# Altium PCB FallDetection.PcbDoc (part 1 of 2)
Units mil, origin at the board's own origin, x right, y up, seen from the top; angles counter-clockwise.
Board outline 2362.2 x 2362.2 mil, 2 copper layers (Top Layer, Bottom Layer); 60 components, 54 nets, 304 pads, 59 vias.
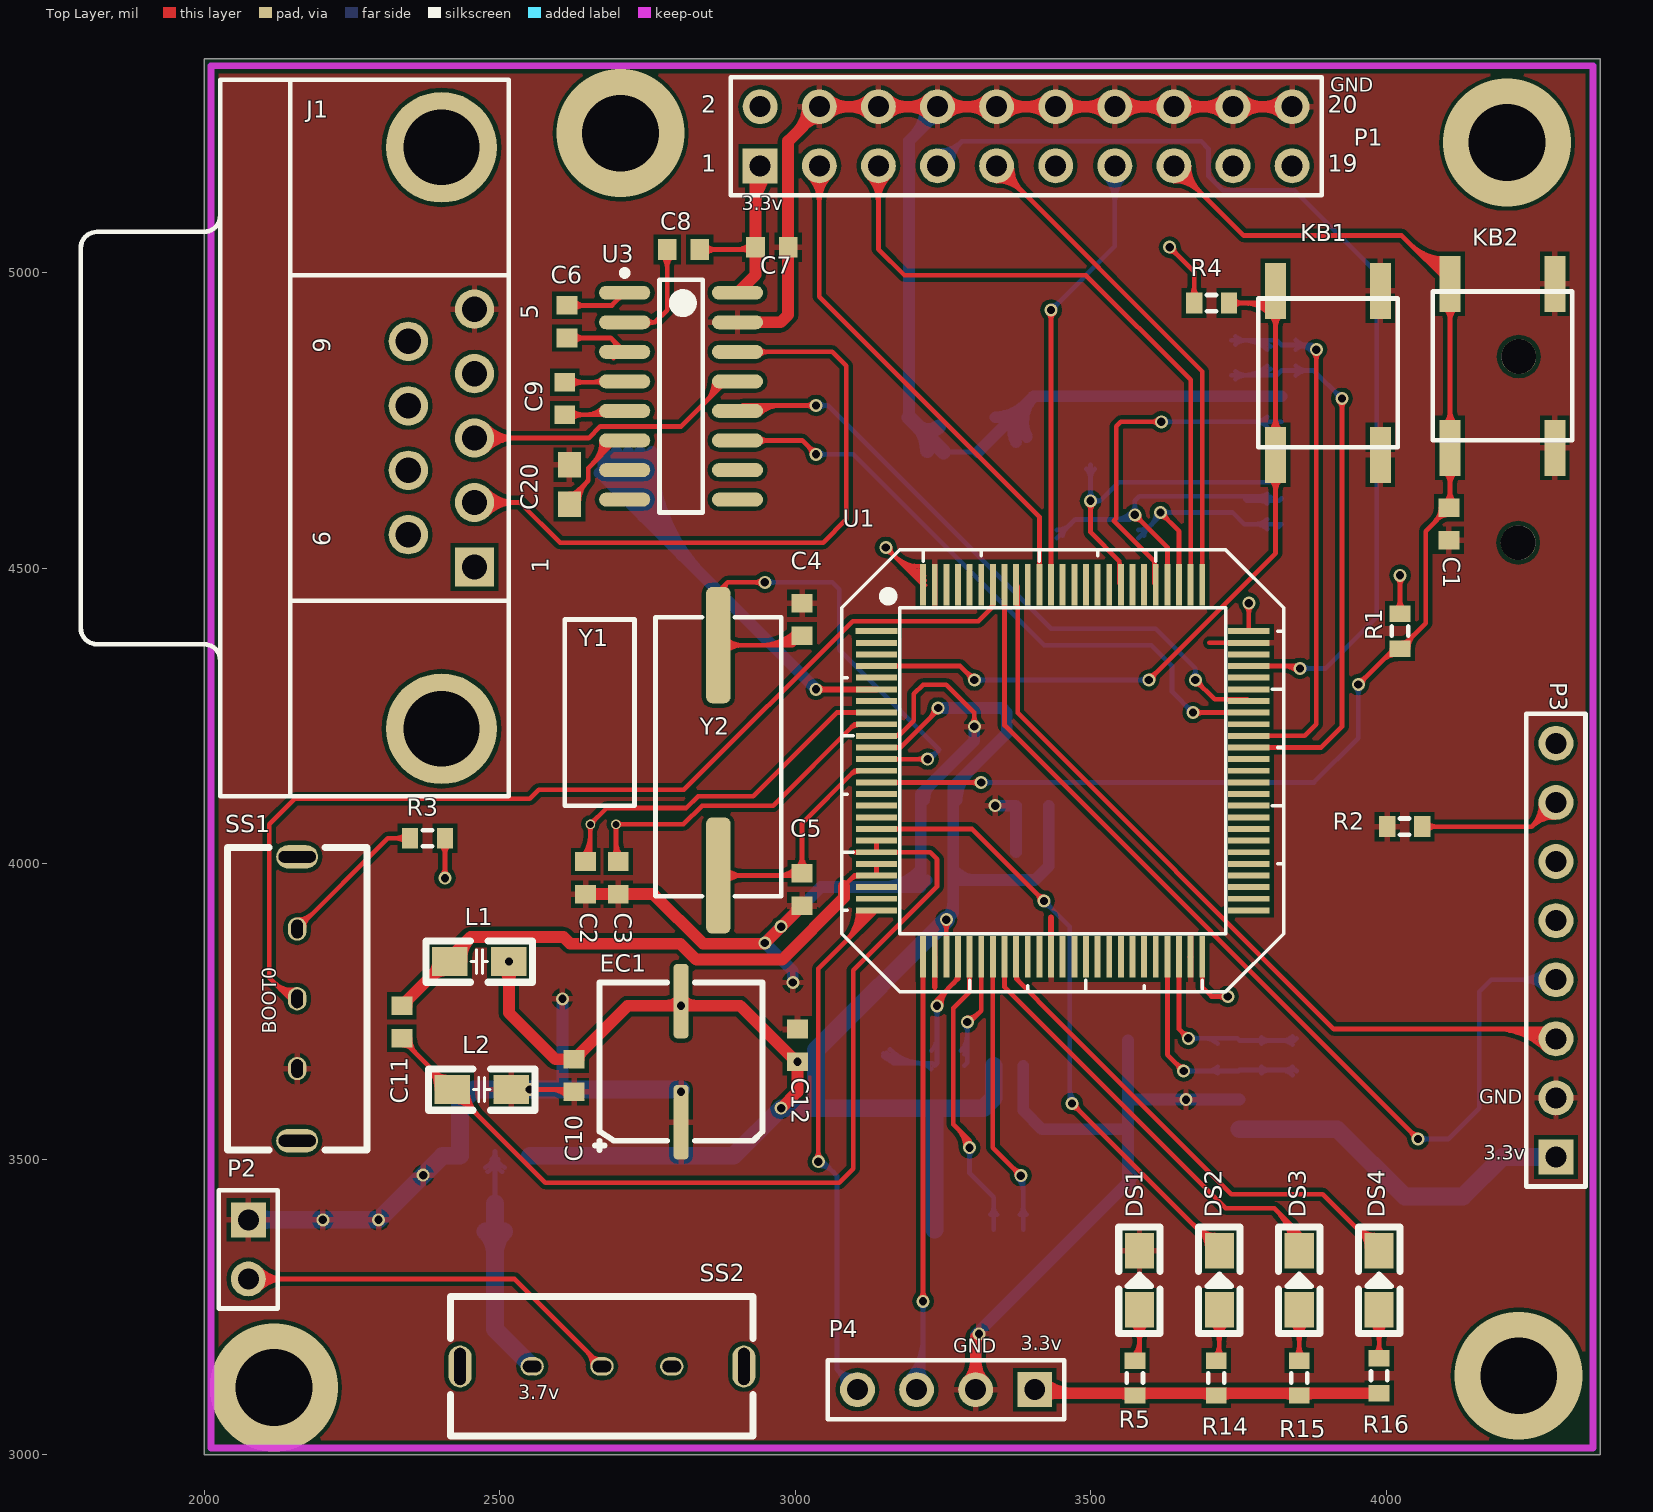
[diagram p0: Top Layer view]
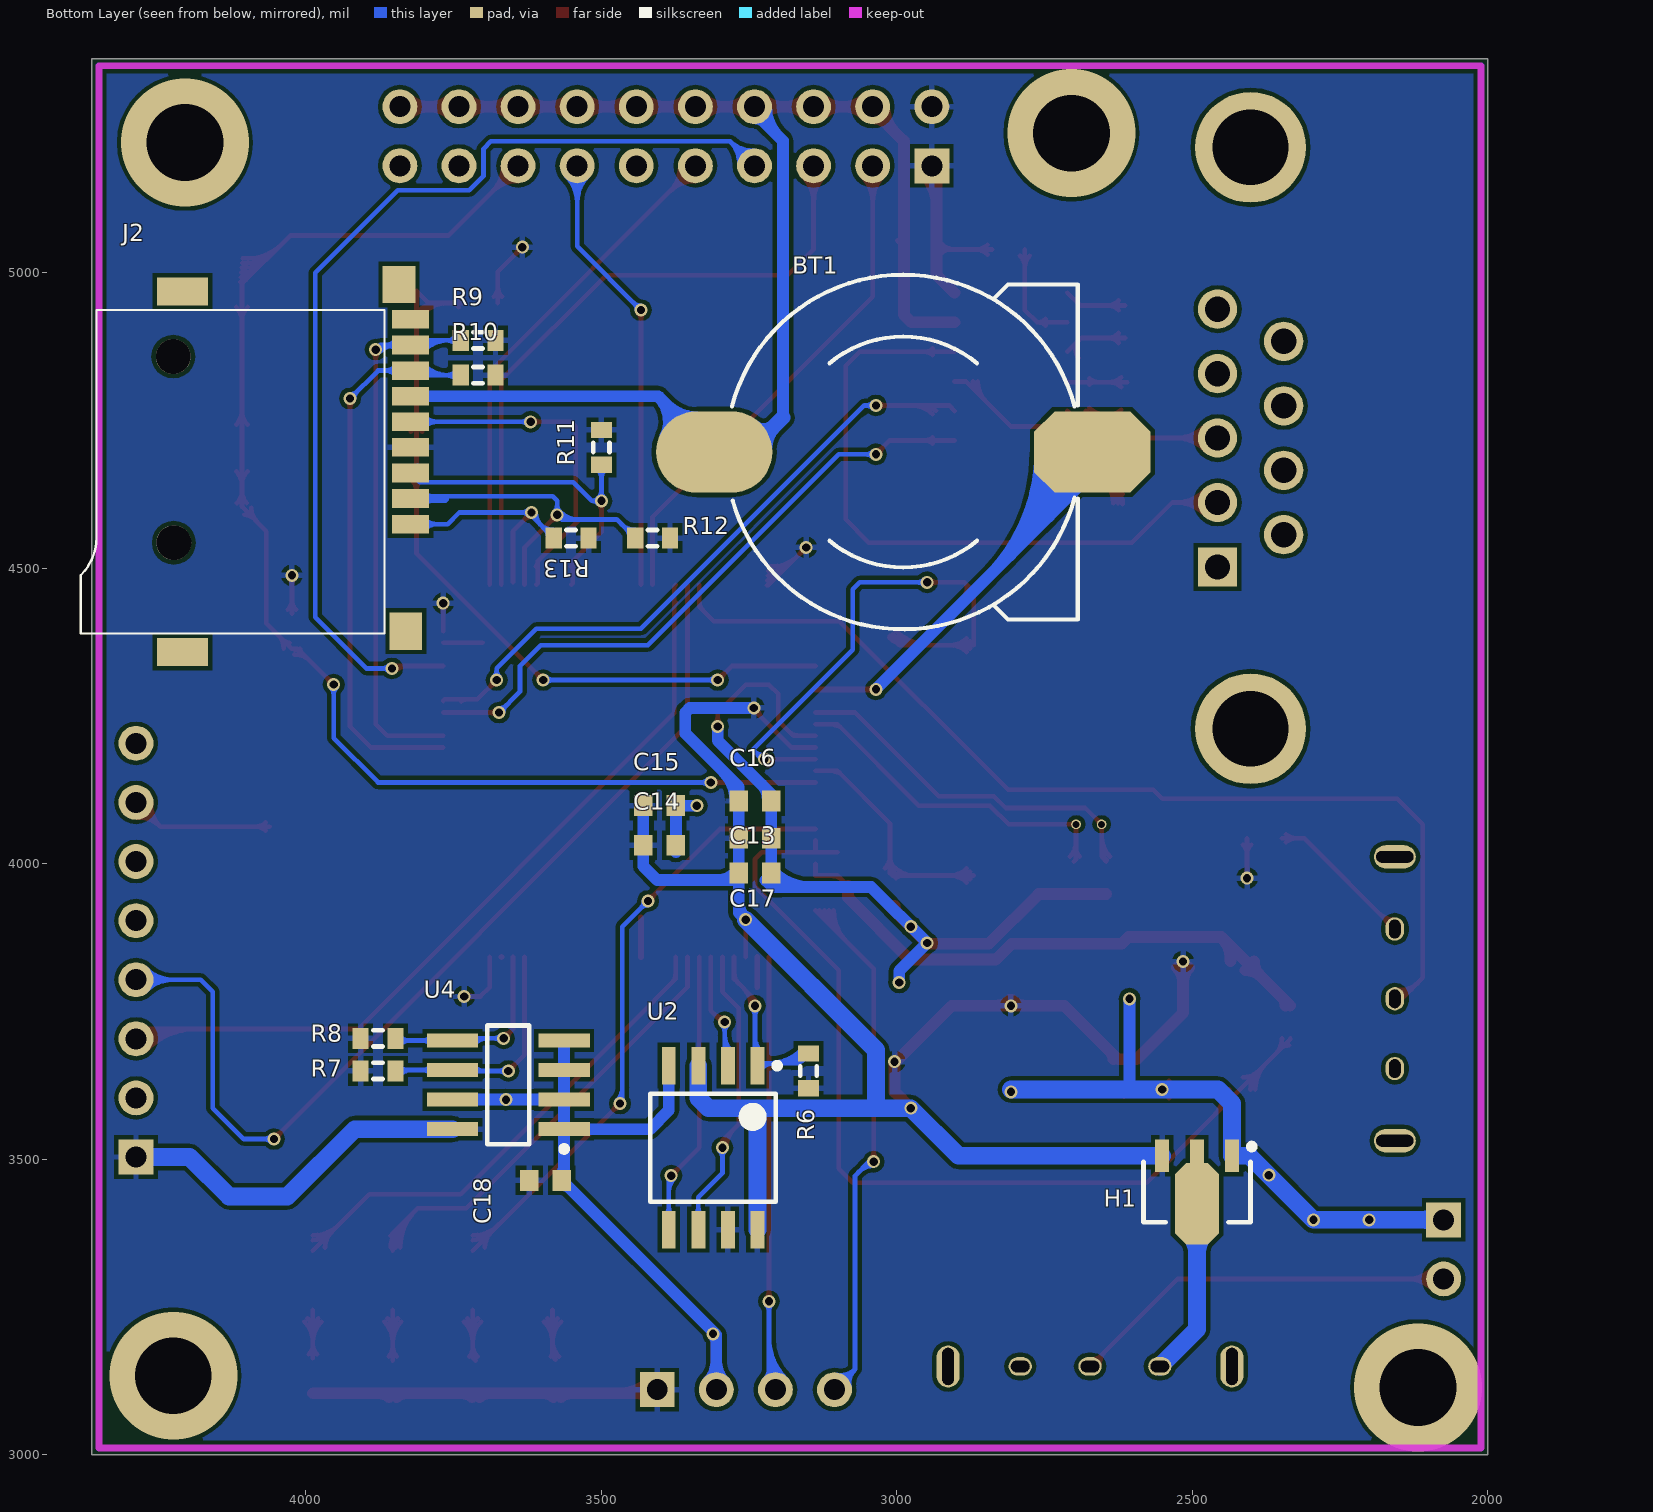
[diagram p1: Bottom Layer view, seen from below]

## Layer stack, top to bottom
Top Layer: signal copper 1.4
Dielectric: dielectric 12.6, FR-4, Dk 4.8
Bottom Layer: signal copper 1.4

## Board outline
2000,3000 4362.2,3000 4362.2,5362.2 2000,5362.2

## Design rules (kind name [scope] priority, off if disabled: settings)
Clearance [All] p1: gap=7
ComponentClearance [All] p1: gap=0 collisioncheckmode=3 verticalgap=0 showdistances=FALSE
HoleSize [All] p1: absolutevalues=TRUE maxlimit=10000 minlimit=1 maxpercent=80.000 minpercent=20.000
HoleToHoleClearance [All] p1: gap=7 allowstackedmicrovias=TRUE
MinimumSolderMaskSliver [All] p1: minsoldermaskwidth=0
NetAntennae [All] p1: netantennaetolerance=5
PolygonConnect [All] p1: connectstyle=Relief reliefconductorwidth=10 reliefentries=4 polygonreliefangle="90 Angle"
RoutingVias [All] p1: holewidth=23.62 width=50 viastyle="Through Hole" minholewidth=14 minwidth=20 maxholewidth=150 maxwidth=300
SilkToSilkClearance [All] p1: silktosilkclearance=0
SilkscreenOverComponentPads SilkToSolderMaskClearance [IsPad] p1: minsilkscreentomaskgap=0
SolderMaskExpansion [All] p1: expansion=4
TestPointUsage FabricationTestPointUsage [All] p1: valid=0 allowmultiple=FALSE
Testpoint FabricationTestpoint [All] p1: side=3 testpointundercomponent=TRUE minsize=40 maxsize=100 preferedsize=60 minholesize=0 maxholesize=40 preferedholesize=32 testpointgrid=1 style=297 order=0123456789
Width [All] p1: maxlimit=50 minlimit=8 preferedwidth=8
17 further rules are at their usual default settings.

## Classes and differential pairs
component class storage: C18 J2 R6 R7 R8 R9 R10 R11 R12 R13 U2 U4
component class power: BT1 C10 C11 C12 C13 C14 C15 C16 C17 EC1 H1 L1 L2 P2 SS2
component class periphrial: C1 C6 C7 C8 C9 C20 DS1 DS2 DS3 DS4 J1 KB1 KB2 P1 P3 P4 R1 R2 R4 R5 R14 R15 R16 U3
component class FallDetection: C2 C3 C4 C5 R3 SS1 U1 Y1 Y2

## Components (designator, comment, footprint, x,y, rotation, side; value= is the part's Value field where it differs from the comment)
BT1 "Battery" CR1220 2988.19,4696.85 r270 bottom locked
C1 "104" 1608[0603]#1 4106.3,4574.8 r90 top
C2 "10PF" 1608[0603]#1 2645.67,3976.38 r270 top
C3 "10PF" 1608[0603]#1 2700.79,3976.38 r270 top
C4 "10PF" 1608[0603]#1 3011.81,4413.39 r90 top
C5 "10PF" 1608[0603]#1 3011.81,3956.69 r270 top
C6 "Cap" 1608[0603]#1 2614.17,4917.32 r270 top
C7 "Cap" 1608[0603]#1 2960.63,5043.31 r0 top
C8 "Cap" 1608[0603]#1 2811.02,5039.37 r180 top
C9 "Cap" 1608[0603]#1 2610.24,4787.4 r270 top
C10 "1uF" 1608[0603]#1 2625.98,3641.73 r90 top
C11 "1uF" 1608[0603]#1 2334.65,3732.28 r90 top
C12 "Cap" 1608[0603]#1 3003.94,3692.91 r90 top
C13 "Cap" 1608[0603]#1 3240.16,4043.31 r0 bottom
C14 "Cap" 1608[0603]#1 3401.57,4031.5 r0 bottom
C15 "Cap" 1608[0603]#1 3401.57,4098.43 r0 bottom
C16 "Cap" 1608[0603]#1 3240.16,4106.3 r0 bottom
C17 "Cap" 1608[0603]#1 3240.16,3984.25 r0 bottom
C18 "Cap" 1608[0603]#1 3594.49,3464.57 r0 bottom
C20 "Cap" 1608[0603]#2 2618.11,4641.73 r90 top
DS1 "LED" 0805D 3582.68,3295.28 r90 top
DS2 "LED" 0805D 3717.85,3295.28 r90 top
DS3 "LED" 0805D 3853.02,3295.28 r90 top
DS4 "LED" 0805D 3988.19,3295.28 r90 top
EC1 "47uF/25V" "47UF 25V SMT Caps" 2807.09,3767.72 r270 top
H1 "HT7333-SOP89" HT7333-SOT89 2492.13,3444.88 r270 bottom
J1 "D Connector 9" DSUB1.385-2H9 2027.56,4720.47 r90 top
J2 "TF_Card" MICROSD 3822.83,4574.8 r0 bottom locked
KB1 "KEY4Pin" KEY4Pin 3901.57,4830.71 r270 top
KB2 "KEY4Pin" KEY4Pin 4196.85,4842.52 r270 top
L1 "10uH" 0805C 2515.75,3834.65 r180 top
L2 "10uH" 0805C 2519.68,3618.11 r180 top
P1 "JTAG" HDR2X10 2940.94,5181.1 r0 top
P2 "POWER VCC" HDR1X2 2074.8,3397.64 r270 top
P3 "MPU6050" HDR1X8 4287.4,3503.94 r90 top
P4 "bluetooth1" HDR1X4 3405.51,3110.24 r180 top
R1 "Res1" J1-0603 4023.62,4393.7 r90 top
R2 "Res1" J1-0603 4031.5,4062.99 r0 top
R3 "Res1" J1-0603 2377.95,4043.31 r0 top
R4 "Res1" J1-0603 3704.72,4948.82 r180 top
R5 "Res1" J1-0603 3574.8,3129.92 r270 top
R6 "Res1" J1-0603 3149.61,3649.61 r270 bottom
R7 "Res1" J1-0603 3877.95,3649.61 r0 bottom
R8 "Res1" J1-0603 3877.95,3704.72 r0 bottom
R9 "Res1" J1-0603 3708.66,4885.83 r180 bottom
R10 "Res1" J1-0603 3708.66,4826.77 r180 bottom
R11 "Res1" J1-0603 3500,4704.72 r90 bottom
R12 "Res1" J1-0603 3413.39,4551.18 r180 bottom
R13 "Res1" J1-0603 3551.18,4551.18 r180 bottom
R14 "Res1" J1-0603 3712.6,3129.92 r270 top
R15 "Res1" J1-0603 3853.02,3129.92 r270 top
R16 "Res1" J1-0603 3988.19,3133.86 r270 top
SS1 "SW" SS-12F44 2157.48,3771.65 r90 top
SS2 "SW" SS-12F44 2673.23,3149.61 r180 top
U1 "STM32F103VET6" TQFP100-2 3452.76,4157.48 r0 top locked
U2 "W25X16A" W25X16A-SOIC127P780X216-8N 3311.02,3519.68 r270 bottom
U3 "MAX3232CSE" MAX3232CSE 2807.09,4791.34 r0 top
U4 "AT24C32D" AT24C32D-SOIC127P600X175-8N 3657.49,3626 r0 bottom
Y1 "XTAL 32.768KHz" XTAL2 2696.85,4066.93 r180 top
Y2 "XTAL 8MHz" XTAL1 2870.08,3980.32 r90 top

## Footprints (in the part's own frame and the unit in brackets; to place one, negate y for a bottom-side part, rotate by r counter-clockwise, add the part's x,y. Pads: shape width x height; smd on the part's side, far side on the other; paste and mask are expansions set on the pad)
"47UF 25V SMT Caps" [mm]
  rrect50% 3.2x0.65 smd: 1(0,0) 2(5.2,0)
  silkscreen extent -0.8,-3.7 6.4,3.5
0805C [mil]
  rect 60x49.21 smd: 1(0,0) 2(100,0)
  silkscreen extent -40,-35 140,35
0805D [mil]
  rect 60x49.21 smd: A(-50,0) K(50,0)
  silkscreen extent -90,-35 90,35, body extent -51,-25 50,25, height 50
1608[0603]#1 [mm] "Chip Capacitor, Body 1.6x0.8mm, IPC High Density"
  rect 0.8x0.9 smd: 1(-0.7,0) 2(0.7,0)
  body extent -0.87,-0.48 0.87,0.48, height 1.3
1608[0603]#2 [mm] "Chip Capacitor; Body 1.6 x 0.8 mm (LxW typ)"
  rect 1.1x1 smd: 1(-0.85,0) 2(0.85,0)
AT24C32D-SOIC127P600X175-8N [mm] "SOIC, 8-Leads, Body 4.92x3.90mm, Pitch 1.27mm, IPC Medium Density"
  rect 2.2x0.6 smd: 1(-2.4,1.905) 2(-2.4,0.635) 3(-2.4,-0.635) 4(-2.4,-1.905) 5(2.4,-1.905) 6(2.4,-0.635) 7(2.4,0.635) 8(2.4,1.905)
  silkscreen extent -2.52,-2.55 0.9,2.88, body extent -2,-2.55 2,2.55, height 1.75
CR1220 [mm] "CR1220"
  oct 3.5x5 smd: 1(0,8.1)
  oval 3.5x5 smd: 2(0,-8.156)
  silkscreen extent -7.62,-7.39 7.62,7.47
DSUB1.385-2H9 [mm] "Connector; D Subminiature; 9 Position; Right Angle; Pitch 1.385 mm"
  rect 1.69x1.69 hole 1.09: 1(-5.54,-10.92)
  round 1.69 hole 1.09: 2(-2.77,-10.92) 3(0,-10.92) 4(2.77,-10.92) 5(5.54,-10.92) 6(-4.155,-8.08) 7(-1.385,-8.08) 8(1.385,-8.08) 9(4.155,-8.08)
  round 4.76 hole 3.26: 10(-12.495,-9.5) 11(12.495,-9.5)
  silkscreen extent -15.4,-12.4 15.4,6
HDR1X2 [mm] "Connector; Header; 2 Position"
  rect 1.5x1.5 hole 0.9: 1(0,0)
  round 1.5 hole 0.9: 2(2.54,0)
  silkscreen extent -1.27,-1.27 3.81,1.27
HDR1X4 [mm] "Connector; Header; 4 Position"
  rect 1.5x1.5 hole 0.9: 1(0,0)
  round 1.5 hole 0.9: 2(2.54,0) 3(5.08,0) 4(7.62,0)
  silkscreen extent -1.27,-1.27 8.89,1.27
HDR1X8 [mm] "Connector; Header; 8 Position"
  rect 1.5x1.5 hole 0.9: 1(0,0)
  round 1.5 hole 0.9: 2(2.54,0) 3(5.08,0) 4(7.62,0) 5(10.16,0) 6(12.7,0) 7(15.24,0) 8(17.78,0)
  silkscreen extent -1.27,-1.27 19.05,1.27
HDR2X10 [mm] "Connector; Header; 10x2 Position"
  rect 1.5x1.5 hole 0.9: 1(0,0)
  round 1.5 hole 0.9: 2(0,2.54) 3(2.54,0) 4(2.54,2.54) 5(5.08,0) 6(5.08,2.54) 7(7.62,0) 8(7.62,2.54) 9(10.16,0) 10(10.16,2.54) 11(12.7,0) 12(12.7,2.54) 13(15.24,0) 14(15.24,2.54) 15(17.78,0) 16(17.78,2.54) 17(20.32,0) 18(20.32,2.54) 19(22.86,0) 20(22.86,2.54)
  silkscreen extent -1.27,-1.27 24.13,3.81
HT7333-SOT89 [mm] "SOT89, 3-Leads, Body 4.5x2.4mm (max), Pitch 1.50mm, Lead Span 3.5mm, IPC Medium Density"
  rect 1.4x0.6 smd: 1(-1.55,1.499) 3(-1.55,-1.499)
  rect 1x0.6 smd: 2(-1.75,0)
  oct 3.5x1.9 smd: 2(0.5,0)
  silkscreen extent -2.07,-2.3 1.3,2.47, body extent -1.3,-2.3 1.3,2.3, height 1.6
J1-0603 [mm] "Chip Resistor, Body 1.6x0.8mm, IPC High Density"
  rect 0.7x0.9 smd: 1(-0.75,0) 2(0.75,0)
  silkscreen extent -0.2,-0.35 0.2,0.35, body extent -0.85,-0.48 0.85,0.48, height 0.9
KEY4Pin [mm] "SOP, 4-Leads, Body 6.0x6.0mm (max), Pitch 4.50mm, IPC Medium Density"
  rect 2.4x0.9 smd: 1(-3.525,2.25) 2(-3.525,-2.25) 3(3.525,-2.25) 4(3.525,2.25)
  silkscreen extent -3.2,-3 3.2,3, body extent -3,-3 3,3, height 5
MAX3232CSE [mm] "SOP, 16-Leads, Body 10.0x4.0mm (max), Pitch 1.27mm, IPC Medium Density"
  oval 2.2x0.6 smd: 1(-2.425,4.445) 2(-2.425,3.175) 3(-2.425,1.905) 4(-2.425,0.635) 5(-2.425,-0.635) 6(-2.425,-1.905) 7(-2.425,-3.175) 8(-2.425,-4.445) 9(2.425,-4.445) 10(2.425,-3.175) 11(2.425,-1.905) 12(2.425,-0.635) 13(2.425,0.635) 14(2.425,1.905) 15(2.425,3.175) 16(2.425,4.445)
  silkscreen extent -2.55,-5 0.93,5.42, body extent -2,-5 2,5, height 1.75
MICROSD [mm] "very tiny MicroSD CARD"
  round 1.5 hole 1.5: 0(10.175,0.8) 0(10.2,-7.2)
  rect 1.6x0.8 smd: 1(0,0) 2(0,-1.1) 3(0,-2.2) 4(0,-3.3) 5(0,-4.4) 6(0,-5.5) 7(0,-6.6) 8(0,-7.7) 9(0,-8.8)
  rect 2.2x1.2 smd: 10(9.8,-10) 13(9.8,5.5)
  rect 1.4x1.6 smd: 11(0.5,-10.3) 12(0.2,4.6)
  silkscreen extent 1.12,-9.2 14.17,4.7
SS-12F44 [mm] "SS-12F44 二挡立式 1P2T SS12F44G5 滑动开关"
  oval 1x0.8 hole 0.5 slot 0.8 at 0 deg: 1(-3,0) 2(0,0) 3(3,0)
  oval 1x1.8 hole 0.5 slot 1.6 at 90 deg: 4(-6.1,0) 5(6.1,0)
  silkscreen extent -6.5,-3 6.5,3
TQFP100-2 [mil] "TQFP100-2"
  rect 70.87x10 smd: 1(-314.96,236.22)
  rect 70x10 smd: 2(-314.96,216.53) 3(-314.96,196.85) 4(-314.96,177.16) 5(-314.96,157.48) 6(-314.96,137.8) 7(-314.96,118.11) 8(-314.96,98.43) 9(-314.96,78.74) 10(-314.96,59.05) 11(-314.96,39.37) 12(-314.96,19.68) 13(-314.96,0) 14(-314.96,-19.69) 15(-314.96,-39.37) 16(-314.96,-59.06) 17(-314.96,-78.74) 18(-314.96,-98.43) 19(-314.96,-118.11) 20(-314.96,-137.8) 21(-314.96,-157.48) 22(-314.96,-177.16) 23(-314.96,-196.85) 24(-314.96,-216.54) 25(-314.96,-236.22) 51(314.96,-236.22) 52(314.96,-216.54) 53(314.96,-196.85) 54(314.96,-177.16) 55(314.96,-157.48) 56(314.96,-137.8) 57(314.96,-118.11) 58(314.96,-98.43) 59(314.96,-78.74) 60(314.96,-59.06) 61(314.96,-39.37) 62(314.96,-19.69) 63(314.96,0) 64(314.96,19.68) 65(314.96,39.37) 66(314.96,59.05) 67(314.96,78.74) 68(314.96,98.43) 69(314.96,118.11) 70(314.96,137.8) 71(314.96,157.48) 72(314.96,177.16) 73(314.96,196.85) 74(314.96,216.53) 75(314.96,236.22)
  rect 10x70 smd: 26(-236.22,-314.96) 27(-216.53,-314.96) 28(-196.85,-314.96) 29(-177.16,-314.96) 30(-157.48,-314.96) 31(-137.8,-314.96) 32(-118.11,-314.96) 33(-98.42,-314.96) 34(-78.74,-314.96) 35(-59.06,-314.96) 36(-39.37,-314.96) 37(-19.68,-314.96) 38(0,-314.96) 39(19.68,-314.96) 40(39.37,-314.96) 41(59.06,-314.96) 42(78.74,-314.96) 43(98.43,-314.96) 44(118.11,-314.96) 45(137.8,-314.96) 46(157.48,-314.96) 47(177.16,-314.96) 48(196.85,-314.96) 49(216.54,-314.96) 50(236.22,-314.96) 76(236.22,314.96) 77(216.54,314.96) 78(196.85,314.96) 79(177.16,314.96) 80(157.48,314.96) 81(137.8,314.96) 82(118.11,314.96) 83(98.43,314.96) 84(78.74,314.96) 85(59.06,314.96) 86(39.37,314.96) 87(19.68,314.96) 88(0,314.96) 89(-19.68,314.96) 90(-39.37,314.96) 91(-59.05,314.96) 92(-78.74,314.96) 93(-98.42,314.96) 94(-118.11,314.96) 95(-137.8,314.96) 96(-157.48,314.96) 97(-177.16,314.96) 98(-196.85,314.96) 99(-216.53,314.96) 100(-236.22,314.96)
  silkscreen extent -374,-374 374,374
W25X16A-SOIC127P780X216-8N [mm] "SOIC, 8-Leads, Body 5.25x3.73mm, Pitch 1.27mm, IPC Medium Density"
  rect 1.6x0.6 smd: 1(-3.525,1.905) 2(-3.525,0.635) 3(-3.525,-0.635) 4(-3.525,-1.905) 5(3.525,-1.905) 6(3.525,-0.635) 7(3.525,0.635) 8(3.525,1.905)
  silkscreen extent -3.65,-2.7 2.33,2.88, body extent -2.65,-2.7 2.65,2.7, height 2.16
XTAL1 [mm] "2 leads XTAL SMT"
  rrect50% 5x1.05 smd: 1(0,0) 2(9.9,0)
  silkscreen extent -0.9,-2.7 11.1,2.7
XTAL2 [mm] "32.768 KHz"
  round 0.42 hole 0.3: 1(0,0) 2(1.1,0)
  silkscreen extent -0.8,-8.8 2.2,-0.8

## Part data
BT1: "Multicell Battery"
C1: library part CAP, "Ceramic Capacitor"
C2 C3 C4 C5 C10 C11: library part Cap, "Capacitor"
C6 C7 C8 C9 C12 C13 C14 C15 C16 C17 C18 C20: "Capacitor"
EC1: library part "Cap Pol1", "Polarized Capacitor (Radial)"
H1: library part HT7333
J1: "Receptacle Assembly, 9 Position, Right Angle"
J2: library part TF_CARD
L1 L2: library part Inductor, "Inductor"
P1: library part "Header 10X2", "Header, 10-Pin, Dual row"
P2: library part "Header 2", "Header, 2-Pin"
P3: library part "Header 8", "Header, 8-Pin"
P4: library part "Header 4", "Header, 4-Pin"
R1 R3 R4 R5 R6 R7 R8 R9 R10 R11 R12 R13 R14 R15 R16: "Resistor"
R2: library part Res3, "Resistor"
SS1 SS2: library part SS-12F44, "拨动开关 SS-12F44 二挡立式 1P2T SS12F44G5 滑动开关"
U1: "ST High-density performance line ARM-based 32-bit MCU with 256 to  512KB Flash, USB, CAN, 11 timers, 3 ADCs, 13 communication interfaces"
U2: "W25X16A, Serial Flash, 16M-bit, 2M-Byte"
U4: "EEPROM, 32K"
Y1 Y2: library part XTAL, "Crystal Oscillator"

## Via types
v1: diameter 22, hole 14, Top Layer to Bottom Layer, 55 vias
v2: diameter 216.54, hole 129.92, Top Layer to Bottom Layer, 4 vias

## Nets (pads, with @x,y where several pads share a name; then routed paths per layer and width w, separated by ;. In a path a pad name is that pad's centre, name@x,y a point inside that pad or via, vN(x,y) a via of type N, cw(c..) or ccw(c..) an arc to the next point about the centre after c; other vN are vias at no path point)
3V3: C7.1 C8.1 C10.2 C12.1 C13.2 C14.2 C15.2 C16.2 C17.2 C18.2 EC1.1 H1.3 J2.4 L1.1 P1.1 P1.2 P3.1 P4.1 R1.2 R3.2 R4.2 R5.2 R6.2 R7.2 R8.2 R9.2 R10.2 R11.2 R12.2 R13.2 R14.2 R15.2 R16.2 U1.11 U1.28 U1.50 U1.75 U1.100 U2.3 U2.7 U2.8 U3.16 U4.8 | length 7183.5
  Top Layer w8: R3.2@2400.57,4032.46 cw(c2383.87,4015.76) 2407.48,4015.76 cw(c2431.09,4015.76) R3.2@2414.4,4032.46 ; v1@2402.53,3980.78 ccw(c2390.58,3992.73) 2407.48,3992.73 ccw(c2424.38,3992.73) v1@2412.43,3980.78 ; v1(2407.48,3975.83) R3.2@2407.48,4043.31 ; C8.1@2838.58,5039.37 2929.13,5039.37 C7.1@2933.07,5043.31 ; C8.1@2846.89,5031.06 cw(c2866.94,5011.01) 2866.94,5039.37 cw(c2866.94,5067.73) C8.1@2846.89,5047.68 ; 2899.96,5039.37 ccw(c2899.96,5074.45) C7.1@2924.76,5049.65 ; 2909.46,5039.37 cw(c2909.46,5017.73) C7.1@2924.76,5033.03 ; P1.1@2933.07,5173.23 P1.1@2940.94,5181.1 ; U1.11@3137.79,4196.85 3178.02,4196.85 v1@3242.01,4260.84 ; v1@3153.54,4528.43 cw(c3153.54,4511.53) 3165.49,4523.48 cw(c3177.44,4535.43) v1@3160.54,4535.43 ; v1(3153.54,4535.43) U1.100@3216.54,4472.44 ; 3168.55,4520.43 ccw(c3210.34,4562.22) U1.100@3216.43,4503.44 ; 3180.43,4508.55 ccw(c3212.57,4540.69) U1.100@3217.26,4495.48 ; 3192.31,4496.67 ccw(c3214.8,4519.16) U1.100@3218.08,4487.52 ; 3204.19,4484.79 ccw(c3217.03,4497.63) U1.100@3218.91,4479.56 ; U1.100@3216.07,4472.91 ccw(c3219.27,4476.1) U1.100@3219.73,4471.61 ; 3227.98,4246.81 ccw(c3211.01,4263.78) v1@3235.01,4263.78 ; 3235.08,4253.91 cw(c3242.01,4246.98) v1@3242.01,4256.78 ; v1@3250.96,3900.56 cw(c3239.01,3888.61) 3255.91,3888.61 cw(c3272.8,3888.61) v1@3260.86,3900.56 ; U1.28@3255.91,3842.52 v1(3255.91,3905.51) ; P4.1@3412.25,3116.97 ccw(c3452.28,3157) 3452.28,3100.39 ; P4.1@3415.35,3100.39 R5.2@3574.8,3100.39 R14.2@3712.6,3100.39 R15.2@3853.02,3100.39 ; P4.1@3417.91,3122.63 ccw(c3471.59,3176.31) 3471.59,3100.39 ; P4.1@3423.56,3092.19 cw(c3443.38,3072.37) 3443.38,3100.39 ; P4.1@3423.56,3128.29 ccw(c3490.9,3195.63) 3490.9,3100.39 ; R5.2@3563.95,3093.48 ccw(c3547.26,3076.78) 3547.26,3100.39 ccw(c3547.26,3124) R5.2@3563.95,3107.31 ; R5.2@3585.66,3093.48 cw(c3602.35,3076.78) 3602.35,3100.39 cw(c3602.35,3124) R5.2@3585.66,3107.31 ; v1@3633.86,5036.31 cw(c3633.86,5019.41) 3645.81,5031.36 cw(c3657.76,5043.31) v1@3640.86,5043.31 ; v1(3633.86,5043.31) 3675.2,5001.97 R4.2@3675.2,4948.82 ; R4.2@3668.28,4959.67 ccw(c3651.59,4976.37) 3675.2,4976.37 ccw(c3698.81,4976.37) R4.2@3682.11,4959.67 ; U1.50@3688.98,3842.52 3688.98,3791.34 3704.72,3775.59 v1(3732.28,3775.59) ; R14.2@3701.75,3093.48 ccw(c3685.05,3076.78) 3685.05,3100.39 ccw(c3685.05,3124) R14.2@3701.75,3107.31 ; R14.2@3723.45,3093.48 cw(c3740.15,3076.78) 3740.15,3100.39 cw(c3740.15,3124) R14.2@3723.45,3107.31 ; v1@3727.33,3770.64 ccw(c3715.38,3758.69) 3715.38,3775.59 ccw(c3715.38,3792.49) v1@3727.33,3780.54 ; v1@3762.77,4435.99 cw(c3750.82,4424.05) 3767.72,4424.05 cw(c3784.62,4424.05) v1@3772.67,4435.99 ; U1.75@3767.72,4393.7 v1(3767.72,4440.94) ; R15.2@3842.17,3093.48 ccw(c3825.47,3076.78) 3825.47,3100.39 ccw(c3825.47,3124) R15.2@3842.17,3107.31 ; R16.2@3984.25,3100.39 R16.2@3988.19,3104.33 ; R1.2@4016.71,4430.14 ccw(c4000.01,4446.84) 4023.62,4446.84 ccw(c4047.23,4446.84) R1.2@4030.54,4430.14 ; v1@4018.67,4483.24 cw(c4006.72,4471.29) 4023.62,4471.29 cw(c4040.52,4471.29) v1@4028.57,4483.24 ; R1.2@4023.62,4423.23 v1(4023.62,4488.19)
  Top Layer w20: L1.1@2505.42,3824.32 cw(c2480.49,3799.38) 2515.75,3799.38 cw(c2551.01,3799.38) L1.1@2526.08,3824.32 ; v1(2515.75,3834.65) 2515.75,3748.03 2594.49,3669.29 C10.2@2625.98,3669.29 2716.54,3759.84 v1(2807.09,3759.84) 2907.06,3759.84 3001.55,3665.35 v1(3003.94,3665.35) 3003.94,3614.17 v1(2976.38,3586.61) ; C10.2@2633.7,3669.29 cw(c2652.33,3669.29) C10.2@2639.16,3682.46 ; 2781.33,3759.84 ccw(c2781.33,3793.47) EC1.1@2805.11,3769.69 ; EC1.1@2809.06,3769.69 ccw(c2832.84,3793.47) 2832.84,3759.84 ; U3.16@2902.56,4966.34 2933.07,4996.85 C7.1@2933.07,5043.31 P1.1@2933.07,5173.23 ; 2933.07,5114.95 cw(c3007.1,5114.95) P1.1@2954.75,5167.29 ; P4.1@3405.51,3110.24 3411.42,3104.33 R16.2@3988.19,3104.33 ; P4.1@3419.32,3096.43 cw(c3438.4,3077.35) 3438.4,3104.33 ; P4.1@3419.32,3124.04 ccw(c3466.91,3171.64) 3466.91,3104.33 ; 3552.24,3104.33 cw(c3552.24,3081.76) R5.2@3568.19,3097.72 ; R5.2@3581.41,3097.72 cw(c3597.37,3081.76) 3597.37,3104.33 ; 3690.03,3104.33 cw(c3690.03,3081.76) R14.2@3705.99,3097.72 ; R14.2@3719.21,3097.72 cw(c3735.16,3081.76) 3735.16,3104.33 ; 3830.45,3104.33 cw(c3830.45,3081.76) R15.2@3846.41,3097.72 ; R15.2@3859.63,3097.72 cw(c3875.58,3081.76) 3875.58,3104.33
  Bottom Layer w20: v1(3242.01,4263.78) 3350.39,4263.78 3358.27,4255.91 3358.27,4220.7 3267.72,4130.15 C16.2@3267.72,4106.3 C13.2@3267.72,4043.31 C17.2@3267.72,3984.25 ; v1@3255.2,3906.22 ccw(c3224.98,3936.44) 3267.72,3936.44 ; v1(3255.91,3905.51) 3267.72,3917.32 C17.2@3267.72,3984.25 ; C17.2@3271.78,3986.35 ccw(c3305.36,4019.92) 3305.36,3972.44 ; C16.2@3273.46,4108.27 cw(c3340.17,4108.27) 3293,4155.43 ; C15.2@3429.13,4098.43 C14.2@3429.13,4031.5 3429.13,3996.06 3405.51,3972.44 3279.53,3972.44 C17.2@3267.72,3984.25
  Bottom Layer w30: H1.3@2551.14,3505.91 2895.67,3505.91 v1(2976.38,3586.61) 3035.43,3586.61 ; U2.8@3236.02,3380.91 3236.02,3582.48 3240.16,3586.61 ; v1(3255.91,3905.51) 3035.43,3685.03 3035.43,3586.61 ; U2.3@3336.02,3658.46 3336.02,3603.74 3318.9,3586.61 3240.16,3586.61 ; U4.8@3751.98,3551 3917.5,3551 4031.5,3437.01 4129.92,3437.01 4196.85,3503.94 P3.1@4287.4,3503.94 ; P3.1@4277.13,3493.66 ccw(c4252.33,3468.86) 4252.33,3503.94 ccw(c4252.33,3539.01) P3.1@4277.13,3514.21 ; 3035.43,3586.61 3240.16,3586.61
3V7: H1.2 SS2.3 | length 624.4
  Bottom Layer w8: H1.2@2475.76,3485.81 ccw(c2460.05,3513.78) H1.2@2492.13,3513.78 ; H1.2@2479.68,3478.84 ccw(c2467.73,3500.11) 2492.13,3500.11 ccw(c2516.52,3500.11) H1.2@2504.57,3478.84 ; H1.2@2486.6,3500.38 cw(c2473.27,3487.05) 2492.13,3487.05 cw(c2510.98,3487.05) H1.2@2497.65,3500.38 ; H1.2@2492.13,3425.2 H1.2@2492.13,3513.78 ; H1.2@2508.49,3485.81 cw(c2524.2,3513.78) H1.2@2492.13,3513.78
  Bottom Layer w30: H1.2@2476.29,3377.86 cw(c2438.04,3339.62) 2492.13,3339.62 cw(c2546.21,3339.62) H1.2@2507.97,3377.86 ; H1.2@2492.13,3425.2 2492.13,3212.6 SS2.3@2555.12,3149.61
A3V3: C11.2 L1.2 U1.21 U1.22 | length 1099.7
  Top Layer w8: 3082.68,3962.48 3100.51,3980.32 U1.22@3137.79,3980.32 U1.21@3137.79,4000 ; 3093.65,3973.46 cw(c3107.79,3959.31) U1.22@3107.79,3979.32 ; 3096.87,3976.67 cw(c3104.44,3969.1) U1.22@3107.51,3979.36
  Top Layer w20: C11.2@2334.65,3759.84 2451.05,3876.25 ; C11.2@2342.36,3759.84 cw(c2360.99,3759.84) C11.2@2347.82,3773.02 ; 2383.87,3809.07 cw(c2410.35,3782.59) L1.2@2410.35,3820.04 ; L1.2@2386.06,3811.26 ccw(c2362.67,3834.65) L1.2@2395.75,3834.65 ; L1.2@2435.72,3835.58 cw(c2488.34,3838.97) 2451.05,3876.25 ; 3082.68,3962.48 3082.68,3942.49 2978.07,3837.89 2832.99,3837.89 2805.99,3864.89 2619.36,3864.89 2608,3876.25 2451.05,3876.25
AGND: C11.1 L2.2 U1.19 U1.20 | length 1891.2
  Top Layer w8: C11.1@2334.65,3704.72 2334.65,3703.15 L2.2@2419.68,3618.11 2577.17,3460.63 3074.8,3460.63 3098.43,3484.25 3098.43,3820.04 3240.16,3961.77 3240.16,4007.87 3228.35,4019.69 U1.20@3137.79,4019.69 ; C11.1@2336.61,3692.98 cw(c2336.61,3673.17) 2350.62,3687.17 ; C11.1@2348.36,3704.72 ccw(c2385.28,3704.72) 2359.17,3678.62 ; 2375.3,3662.5 cw(c2330.92,3618.11) L2.2@2393.68,3618.11 ; 2388.32,3649.47 ccw(c2414.29,3675.44) L2.2@2414.29,3638.72 ; 2388.96,3648.84 cw(c2358.23,3618.11) L2.2@2401.69,3618.11 ; L2.2@2425.08,3597.5 cw(c2425.08,3560.78) 2451.05,3586.75 ; L2.2@2437.68,3618.11 ccw(c2481.14,3618.11) 2450.41,3587.38 ; L2.2@2445.68,3618.11 ccw(c2508.45,3618.11) 2464.07,3573.73 ; 3100.51,4019.69 U1.20@3137.79,4019.69 ; U1.19@3137.79,4039.37 U1.20@3137.79,4019.69
BOOT0: SS1.2 U1.94 | length 1843.1
  Top Layer w8: 2117.92,3799.4 ccw(c2148.73,3830.2) SS1.2@2155.62,3787.19 ; 2129,3788.32 ccw(c2151.79,3811.11) SS1.2@2156.89,3779.29 ; 2140.08,3777.25 ccw(c2154.85,3792.02) SS1.2@2158.15,3771.39 ; SS1.2@2157.48,3771.65 2145.67,3771.65 2110.05,3807.28 2110.05,4066.74 2153.54,4110.24 2551.18,4110.24 2566.1,4125.16 2811.85,4125.16 3097.39,4410.7 3310.19,4410.7 3334.65,4435.16 U1.94@3334.65,4472.44 ; 3327.79,4428.3 ccw(c3313.64,4442.44) U1.94@3333.65,4442.44
GND: BT1.2 C1.1 C2.2 C3.2 C4.2 C5.2 C7.2 C10.1 C12.2 C13.1 C14.1 C15.1 C16.1 C17.1 C18.1 C20.2 DS1.K EC1.2 H1.1 J1.5 J2.6 KB1.1 KB1.4 KB2.1 KB2.4 L2.1 P1.4 P1.6 P1.8 P1.10 P1.12 P1.14 P1.16 P1.18 P1.20 P2.1 P3.2 P4.2 R2.1 SS1.1 U1.10 U1.27 U1.37 U1.49 U1.74 U1.99 U2.4 U3.15 U4.1 U4.2 U4.3 U4.4 U4.7 | length 11522.1
  Top Layer w8: L2.1@2519.68,3618.11 v1(2551.18,3618.11) 2622.05,3618.11 C10.1@2625.98,3614.17 ; L2.1@2533.99,3609.2 cw(c2555.51,3587.68) 2555.51,3618.11 cw(c2555.51,3648.54) L2.1@2533.99,3627.02 ; L2.1@2539.65,3603.54 cw(c2574.83,3568.36) 2574.83,3618.11 cw(c2574.83,3667.86) L2.1@2539.65,3632.68 ; L2.1@2546.23,3613.16 ccw(c2534.28,3601.21) 2534.28,3618.11 ccw(c2534.28,3635.01) L2.1@2546.23,3623.06 ; v1@2556.13,3613.16 cw(c2568.08,3601.21) 2568.08,3618.11 cw(c2568.08,3635.01) v1@2556.13,3623.06 ; 2586.15,3618.11 cw(c2586.15,3576.31) C10.1@2615.71,3605.87 ; 2605.16,3618.11 ccw(c2605.16,3633.03) C10.1@2615.71,3622.48 ; 2605.46,3618.11 cw(c2605.46,3595.62) C10.1@2621.37,3611.52 ; C7.2@2988.19,5043.31 C7.2@2999.42,5054.54 ; U1.10@3137.79,4216.54 3175.08,4216.54 3200.79,4242.24 3200.79,4287.4 3216.54,4303.15 3255.91,4303.15 3303.15,4255.91 v1(3303.15,4232.28) ; P1.6@3140.94,5281.1 P1.8@3240.94,5281.1 P1.10@3340.94,5281.1 P1.12@3440.94,5281.1 P1.14@3540.94,5281.1 P1.16@3640.94,5281.1 P1.18@3740.94,5281.1 ; P1.6@3153.34,5268.71 cw(c3183.26,5238.79) 3183.26,5281.1 cw(c3183.26,5323.42) P1.6@3153.34,5293.5 ; P1.6@3159,5263.05 cw(c3202.57,5219.47) 3202.57,5281.1 cw(c3202.57,5342.73) P1.6@3159,5299.15 ; U1.10@3167.79,4217.54 ccw(c3167.79,4237.54) 3181.94,4223.39 ; P1.8@3222.89,5263.05 ccw(c3179.32,5219.47) 3179.32,5281.1 ccw(c3179.32,5342.73) P1.8@3222.89,5299.15 ; P1.8@3228.55,5268.71 ccw(c3198.63,5238.79) 3198.63,5281.1 ccw(c3198.63,5323.42) P1.8@3228.55,5293.5 ; P1.8@3253.34,5268.71 cw(c3283.26,5238.79) 3283.26,5281.1 cw(c3283.26,5323.42) P1.8@3253.34,5293.5 ; P1.8@3259,5263.05 cw(c3302.57,5219.47) 3302.57,5281.1 cw(c3302.57,5342.73) P1.8@3259,5299.15 ; v1@3298.2,4237.23 ccw(c3286.25,4249.18) 3303.15,4249.18 ccw(c3320.05,4249.18) v1@3308.1,4237.23 ; P1.10@3322.89,5263.05 ccw(c3279.32,5219.47) 3279.32,5281.1 ccw(c3279.32,5342.73) P1.10@3322.89,5299.15 ; P1.10@3328.55,5268.71 ccw(c3298.63,5238.79) 3298.63,5281.1 ccw(c3298.63,5323.42) P1.10@3328.55,5293.5 ; P1.10@3353.34,5268.71 cw(c3383.26,5238.79) 3383.26,5281.1 cw(c3383.26,5323.42) P1.10@3353.34,5293.5 ; P1.10@3359,5263.05 cw(c3402.57,5219.47) 3402.57,5281.1 cw(c3402.57,5342.73) P1.10@3359,5299.15 ; P1.12@3422.89,5263.05 ccw(c3379.32,5219.47) 3379.32,5281.1 ccw(c3379.32,5342.73) P1.12@3422.89,5299.15 ; P1.12@3428.55,5268.71 ccw(c3398.63,5238.79) 3398.63,5281.1 ccw(c3398.63,5323.42) P1.12@3428.55,5293.5 ; P1.12@3453.34,5268.71 cw(c3483.26,5238.79) 3483.26,5281.1 cw(c3483.26,5323.42) P1.12@3453.34,5293.5 ; P1.12@3459,5263.05 cw(c3502.57,5219.47) 3502.57,5281.1 cw(c3502.57,5342.73) P1.12@3459,5299.15 ; P1.14@3522.89,5263.05 ccw(c3479.32,5219.47) 3479.32,5281.1 ccw(c3479.32,5342.73) P1.14@3522.89,5299.15 ; P1.14@3528.55,5268.71 ccw(c3498.63,5238.79) 3498.63,5281.1 ccw(c3498.63,5323.42) P1.14@3528.55,5293.5 ; P1.14@3553.34,5268.71 cw(c3583.26,5238.79) 3583.26,5281.1 cw(c3583.26,5323.42) P1.14@3553.34,5293.5 ; P1.14@3559,5263.05 cw(c3602.57,5219.47) 3602.57,5281.1 cw(c3602.57,5342.73) P1.14@3559,5299.15 ; P1.16@3622.89,5263.05 ccw(c3579.32,5219.47) 3579.32,5281.1 ccw(c3579.32,5342.73) P1.16@3622.89,5299.15 ; P1.16@3628.55,5268.71 ccw(c3598.63,5238.79) 3598.63,5281.1 ccw(c3598.63,5323.42) P1.16@3628.55,5293.5 ; P1.16@3653.34,5268.71 cw(c3683.26,5238.79) 3683.26,5281.1 cw(c3683.26,5323.42) P1.16@3653.34,5293.5 ; P1.16@3659,5263.05 cw(c3702.57,5219.47) 3702.57,5281.1 cw(c3702.57,5342.73) P1.16@3659,5299.15 ; 3700.79,4374.02 U1.74@3767.72,4374.02 ; P1.18@3722.89,5263.05 ccw(c3679.32,5219.47) 3679.32,5281.1 ccw(c3679.32,5342.73) P1.18@3722.89,5299.15 ; P1.18@3728.55,5268.71 ccw(c3698.63,5238.79) 3698.63,5281.1 ccw(c3698.63,5323.42) P1.18@3728.55,5293.5
  Top Layer w10: 3236.22,3791.34 U1.27@3236.22,3842.52 ; U1.37@3433.07,3842.52 3433.07,3909.45
  Top Layer w20: C2.2@2645.67,3948.82 C3.2@2700.79,3948.82 2760.25,3948.82 2844.18,3864.89 2947.57,3864.89 C5.2@3011.81,3929.13 ; U3.15@2902.56,4916.34 2975.39,4916.34 2988.19,4929.13 C7.2@2988.19,5043.31 2988.19,5222.83 3040.94,5275.59 P1.4@3040.94,5281.1 P1.6@3140.94,5281.1 P1.8@3240.94,5281.1 P1.10@3340.94,5281.1 P1.12@3440.94,5281.1 P1.14@3540.94,5281.1 P1.16@3640.94,5281.1 P1.18@3740.94,5281.1 P1.20@3840.94,5281.1 ; C5.2@2998.64,3915.96 ccw(c2985.47,3929.13) C5.2@3004.09,3929.13 ; 3003.71,5238.36 ccw(c2960.97,5281.1) P1.4@3021.42,5281.1 ; 3017.02,5251.66 cw(c3040.94,5227.74) P1.4@3040.94,5261.57 ; P1.4@3054.75,5267.29 cw(c3088.09,5233.96) 3088.09,5281.1 cw(c3088.09,5328.25) P1.4@3054.75,5294.91 ; P1.6@3127.14,5267.29 ccw(c3093.8,5233.96) 3093.8,5281.1 ccw(c3093.8,5328.25) P1.6@3127.14,5294.91 ; P1.6@3154.75,5267.29 cw(c3188.09,5233.96) 3188.09,5281.1 cw(c3188.09,5328.25) P1.6@3154.75,5294.91 ; P1.8@3227.14,5267.29 ccw(c3193.8,5233.96) 3193.8,5281.1 ccw(c3193.8,5328.25) P1.8@3227.14,5294.91 ; P1.8@3254.75,5267.29 cw(c3288.09,5233.96) 3288.09,5281.1 cw(c3288.09,5328.25) P1.8@3254.75,5294.91 ; P4.2@3291.7,3124.04 ccw(c3258.37,3157.38) 3305.51,3157.38 ccw(c3352.66,3157.38) P4.2@3319.32,3124.04 ; P4.2@3305.51,3110.24 3305.51,3199.21 v1(3311.02,3204.72) ; 3305.51,3189 cw(c3326.74,3189) v1@3311.73,3204.02 ; P1.10@3327.14,5267.29 ccw(c3293.8,5233.96) 3293.8,5281.1 ccw(c3293.8,5328.25) P1.10@3327.14,5294.91 ; P1.10@3354.75,5267.29 cw(c3388.09,5233.96) 3388.09,5281.1 cw(c3388.09,5328.25) P1.10@3354.75,5294.91 ; P1.12@3427.14,5267.29 ccw(c3393.8,5233.96) 3393.8,5281.1 ccw(c3393.8,5328.25) P1.12@3427.14,5294.91 ; P1.12@3454.75,5267.29 cw(c3488.09,5233.96) 3488.09,5281.1 cw(c3488.09,5328.25) P1.12@3454.75,5294.91 ; P1.14@3527.14,5267.29 ccw(c3493.8,5233.96) 3493.8,5281.1 ccw(c3493.8,5328.25) P1.14@3527.14,5294.91 ; P1.14@3554.75,5267.29 cw(c3588.09,5233.96) 3588.09,5281.1 cw(c3588.09,5328.25) P1.14@3554.75,5294.91 ; P1.16@3627.14,5267.29 ccw(c3593.8,5233.96) 3593.8,5281.1 ccw(c3593.8,5328.25) P1.16@3627.14,5294.91 ; P1.16@3654.75,5267.29 cw(c3688.09,5233.96) 3688.09,5281.1 cw(c3688.09,5328.25) P1.16@3654.75,5294.91 ; P1.18@3727.14,5267.29 ccw(c3693.8,5233.96) 3693.8,5281.1 ccw(c3693.8,5328.25) P1.18@3727.14,5294.91 ; P1.18@3754.75,5267.29 cw(c3788.09,5233.96) 3788.09,5281.1 cw(c3788.09,5328.25) P1.18@3754.75,5294.91 ; P1.20@3827.14,5267.29 ccw(c3793.8,5233.96) 3793.8,5281.1 ccw(c3793.8,5328.25) P1.20@3827.14,5294.91
  Bottom Layer w8: BT1.2@3251.23,4696.85 BT1.2@3309.29,4696.85 ; v1@3298.2,4227.33 cw(c3286.25,4215.38) 3303.15,4215.38 cw(c3320.05,4215.38) v1@3308.1,4227.33 ; 3303.15,4212.6 v1(3303.15,4232.28) ; C18.1@3563.01,3468.49 C18.1@3566.93,3464.57
  Bottom Layer w20: 2606.3,3618.11 v1(2606.3,3771.65) ; v1(2996.06,3799.21) 2996.06,3818.9 v1(2948.82,3866.14) 3043.31,3960.63 3212.6,3960.63 C17.1@3212.6,3984.25 C13.1@3212.6,4043.31 C16.1@3212.6,4106.3 3212.6,4118.11 3303.15,4208.66 v1(3303.15,4232.28) ; 3146.45,3960.63 ccw(c3146.45,4048.44) C17.1@3208.53,3986.35 ; 3192.91,4755.17 3192.91,5223.62 3240.94,5271.65 P1.8@3240.94,5281.1 ; 3194.73,3960.63 ccw(c3194.73,4000.15) C17.1@3222.68,3972.21 ; 3200.93,5231.64 ccw(c3151.46,5281.1) P1.8@3221.42,5281.1 ; C16.1@3218.35,4108.27 cw(c3255.99,4108.27) 3229.37,4134.88 ; 3223.74,5254.45 cw(c3240.94,5237.24) P1.8@3240.94,5261.57 ; P4.2@3291.7,3124.04 ccw(c3258.37,3157.38) 3305.51,3157.38 ccw(c3352.66,3157.38) P4.2@3319.32,3124.04 ; P4.2@3305.51,3110.24 3305.51,3203.15 C18.1@3566.93,3464.57 ; 3305.51,3189 cw(c3326.74,3189) v1@3311.73,3204.02 ; BT1.2@3309.29,4696.85 3403.78,4791.34 ; v1(3338.58,4098.43) C15.1@3374.02,4098.43 C14.1@3374.02,4031.5 C14.1@3374.02,4019.69 ; BT1.2@3338.82,4755.75 ccw(c3338.82,4826.65) 3388.96,4776.52 ; BT1.2@3373.91,4713.64 cw(c3419.63,4735.51) 3383.79,4771.35 ; U2.4@3386.02,3658.46 3386.02,3582.68 3417.7,3551 U4.1@3563.01,3551 ; BT1.2@3391.95,4722.27 cw(c3446.67,4748.44) 3403.78,4791.34 ; C18.1@3553.76,3451.39 cw(c3566.93,3438.22) C18.1@3566.93,3456.85 ; C18.1@3563.01,3468.49 U4.1@3563.01,3551 ; 3563.01,3489.88 ccw(c3590.28,3489.88) C18.1@3570.99,3470.6 ; U4.4@3563.01,3701 U4.3@3563.01,3651 U4.2@3563.01,3601 ; U4.7@3751.98,3601 U4.2@3563.01,3601 ; J2.6@3822.83,4791.34 3403.78,4791.34 ; U4.1@3563.01,3551 U4.2@3563.01,3601
  Bottom Layer w25: 3192.91,4755.17 BT1.2@3251.23,4696.85 ; BT1.2@3223.42,4699.23 ccw(c3167.87,4701.59) 3207.18,4740.89 ccw(c3225.78,4759.49) BT1.2@3242.94,4739.57
  Bottom Layer w30: P2.1@2074.8,3397.64 v1(2200.79,3397.64) v1(2295.28,3397.64) v1(2370.81,3473.17) 2403.54,3505.91 H1.1@2433.11,3505.91 2433.11,3594.53 2456.69,3618.11 v1(2551.18,3618.11) 2606.3,3618.11 v1@2807.09,3618.11 ; P2.1@2085.08,3387.37 cw(c2109.88,3362.57) 2109.88,3397.64 cw(c2109.88,3432.71) P2.1@2085.08,3407.91
  other v1: 3661.42,3601 2807.09,3614.17 2976.38,3893.7
NetC6_1: C6.1 U3.1 | length 150.9
  Top Layer w8: C6.1@2614.17,4944.88 2690.16,4944.88 U3.1@2711.61,4966.34 ; C6.1@2624.45,4936.57 cw(c2644.5,4916.52) 2644.5,4944.88 cw(c2644.5,4973.24) C6.1@2624.45,4953.19
NetC6_2: C6.2 U3.3 | length 185.5
  Top Layer w8: C6.2@2614.17,4889.76 2688.19,4889.76 U3.3@2711.61,4866.34 ; C6.2@2624.45,4881.46 cw(c2644.5,4861.4) 2644.5,4889.76 cw(c2644.5,4918.13) C6.2@2624.45,4898.07 ; 2691.13,4886.82 cw(c2674.92,4870.62) U3.3@2692.61,4856.04
NetC8_2: C8.2 U3.2 | length 256.9
  Top Layer w8: U3.2@2711.61,4916.34 2762.8,4916.34 2783.46,4937.01 C8.2@2783.46,5039.37 ; U3.2@2748.63,4910.82 cw(c2761.97,4897.48) 2761.97,4916.34 cw(c2761.97,4935.2) U3.2@2748.63,4921.86 ; C8.2@2775.16,5029.09 cw(c2755.1,5009.04) 2783.46,5009.04 cw(c2811.83,5009.04) C8.2@2791.77,5029.09
NetC9_1: C9.1 U3.4 | length 176.1
  Top Layer w8: C9.1@2610.24,4814.96 2710.24,4814.96 U3.4@2711.61,4816.34 ; C9.1@2620.51,4806.65 cw(c2640.57,4786.6) 2640.57,4814.96 cw(c2640.57,4843.32) C9.1@2620.51,4823.27 ; 2657.93,4814.96 ccw(c2657.93,4838.52) U3.4@2674.59,4821.86 ; 2664.59,4814.96 cw(c2664.59,4800.81) U3.4@2674.59,4810.82
NetC9_2: C9.2 U3.5 | length 197.9
  Top Layer w8: C9.2@2610.24,4759.84 2705.12,4759.84 U3.5@2711.61,4766.34 ; C9.2@2620.51,4751.54 cw(c2640.57,4731.48) 2640.57,4759.84 cw(c2640.57,4788.2) C9.2@2620.51,4768.15 ; 2645.58,4759.84 ccw(c2645.58,4800.88) U3.5@2674.59,4771.86 ; 2664.89,4759.84 ccw(c2664.89,4781.57) U3.5@2680.25,4766.2
NetC20_1: C20.1 U3.6 | length 330.3
  Top Layer w8: C20.1@2618.11,4608.27 2618.11,4616.89 2649.8,4648.57 2649.8,4669.69 2696.44,4716.34 U3.6@2711.61,4716.34 ; C20.1@2618.11,4625.92 ccw(c2618.11,4647.73) 2633.53,4632.31 ; C20.1@2625.8,4610.24 cw(c2660.41,4610.24) 2635.93,4634.71 ; C20.1@2633.8,4610.24 cw(c2687.72,4610.24) 2649.59,4648.37 ; 2657.96,4677.85 ccw(c2623.05,4712.76) U3.6@2672.32,4715.85 ; 2670.49,4690.39 ccw(c2646.64,4714.24) U3.6@2680.31,4716.35 ; 2683.02,4702.92 ccw(c2670.23,4715.72) U3.6@2688.29,4716.85 ; U3.6@2695.56,4715.45 ccw(c2693.81,4717.2) U3.6@2696.28,4717.35
NetDS1_A: DS1.A R5.1 | length 254.9
  Top Layer w8: DS1.A@3568.11,3225.31 cw(c3532.93,3190.13) 3582.68,3190.13 cw(c3632.43,3190.13) DS1.A@3597.25,3225.31 ; R5.1@3571.83,3166.36 ccw(c3545.63,3192.56) 3582.68,3192.56 ; DS1.A@3573.76,3230.97 cw(c3552.24,3209.45) 3582.68,3209.45 cw(c3613.11,3209.45) DS1.A@3591.59,3230.97 ; R5.1@3577.48,3160.71 ccw(c3564.94,3173.25) 3582.68,3173.25 ; R5.1@3582.68,3167.32 DS1.A@3582.68,3245.28 ; 3582.68,3173.55 ccw(c3592.85,3173.55) R5.1@3585.66,3166.36